# Altium PCB 智能车主板.PcbDoc (part 2 of 2)
Units mm, origin at the board's own origin, x right, y up, seen from the top; angles counter-clockwise.
Board outline 100.45 x 65.28 mm, 4 copper layers (Top, GND02, PWR03, Bottom), stack 0.603 mm thick; 92 components, 74 nets, 364 pads, 217 vias.
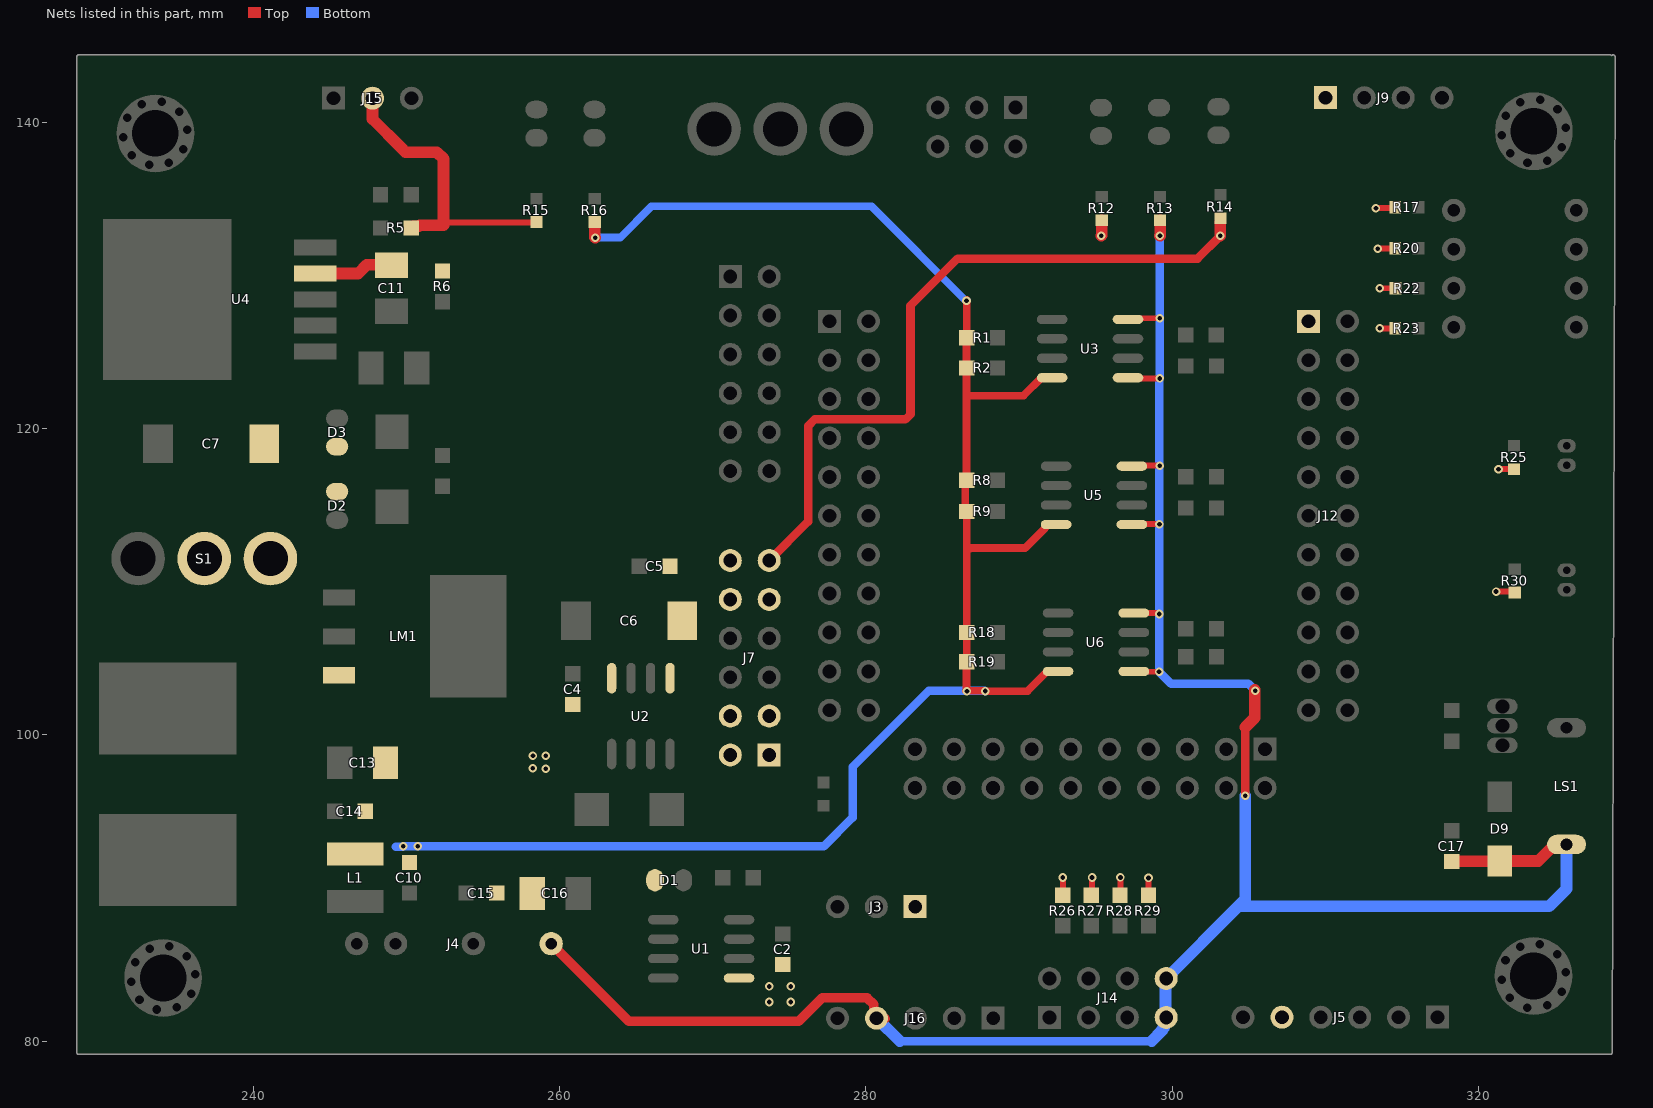
[diagram p4: the nets of this part, all layers, seen from the top]

## Via types
v1: diameter 0.559, hole 0.305, Top to Bottom, tented both sides, 216 vias
v2: diameter 0.559, hole 0.305, Top to Bottom, 1 vias

## Nets (pads, with @x,y where several pads share a name; then routed paths per layer and width w, separated by ;. In a path a pad name is that pad's centre, name@x,y a point inside that pad or via, vN(x,y) a via of type N, cw(c..) or ccw(c..) an arc to the next point about the centre after c; other vN are vias at no path point) (continued)
V5: C10.1 C13.1 C14.1 L1.1 LM1.3 R1.1 R2.1 R8.1 R9.1 R16.1 R18.1 R19.1 U3.8 U5.8 U6.8 | length 118.5
  Top w0.508: R9.1@286.489,114.477 286.489,116.658 286.565,116.734 286.565,122.264 ; v1@286.516,102.868 v1@286.59,102.868 ; R9.1@286.591,114.58 286.591,112.362 ; v1@286.591,128.396 R1.1@286.591,125.935 286.575,125.951 286.574,122.318 286.758,122.134 290.282,122.134 291.465,123.317 U3.8@292.165,123.317 ; v1(286.598,102.847) 286.598,102.861 v1@286.59,102.868 ; 286.792,112.161 286.763,112.19 ; v1(287.797,102.853) 287.806,102.843 287.842,102.843 287.848,102.838 290.544,102.838 291.846,104.14 U6.8@292.546,104.14 ; v1@287.797,102.868 v1@286.59,102.868 ; U5.8@292.419,113.728 291.744,113.728 291.701,113.686 291.701,113.503 290.389,112.19 286.763,112.19 ; v1@286.59,102.868 286.57,102.889 286.57,104.754 R19.1@286.591,104.775 286.589,104.778 286.589,106.677 R18.1@286.591,106.68 286.591,112.362 ; 286.591,112.362 286.763,112.19
  Top w0.762: R16.1@262.294,133.483 262.294,132.495 v1(262.324,132.465)
  Bottom w0.508: v1(262.324,132.465) 263.952,132.465 266,134.513 280.36,134.513 286.522,128.351 286.56,128.351 v1(286.57,128.341)
  Bottom w0.559: 249.306,92.679 249.756,92.679 v1(249.793,92.716) v1(250.728,92.716) 277.254,92.716 279.131,94.592 279.131,97.898 284.113,102.881 287.768,102.881 v1(287.797,102.853)
V6: C11.1 J15.2 R5.1 R6.1 R15.1 U4.4 | length 23.6
  Top w0.381: 252.421,133.45 258.208,133.45 R15.1@258.24,133.482
  Top w0.762: U4.4@244.029,130.124 246.837,130.124 247.396,130.683 C11.1@248.285,130.683 ; J15.2@247.777,141.224 247.777,140.208 249.682,138.303 249.936,138.049 251.975,138.049 252.421,137.603 252.421,133.272 250.866,133.272 250.809,133.215 250.42,133.215 R5.1@250.301,133.096
VBAT: C7.1 D2.1 D3.1 S1.1
VBAT+: S1.2
VCC: J12.1
VCC3.3: C2.1 J3.1 J5.5 J9.1 R12.1 R17.2 R20.2 R22.2 R23.2 R25.1 R26.2 R27.2 R28.2 R29.2 R30.1 U1.5 | length 11.8
  Top w0.381: R26.2@292.862,89.519 v1(292.862,90.678) ; R27.2@294.767,89.519 v1(294.767,90.678) ; R28.2@296.62,89.523 v2(296.62,90.682) ; R29.2@298.452,89.49 v1(298.452,90.649) ; v1(313.426,131.745) R20.2@314.444,131.745 ; v1@313.428,134.392 R17.2@314.446,134.392 ; v1(313.556,126.538) R23.2@314.574,126.538 ; v1(313.563,129.159) R22.2@314.581,129.159 ; v1(321.149,109.351) R30.1@322.165,109.351 ; v1(321.31,117.348) R25.1@322.326,117.348
  Top w0.762: v1(295.377,132.588) 295.402,132.613 R12.1@295.402,133.606
  other v1: 273.685,82.55 275.082,82.55 273.685,83.566 275.082,83.566 313.307,134.372
VCC5: C4.2 C15.1 C16.1 C17.1 D1.1 D9.2 J4.4 J7.1 J7.2 J7.3 J7.4 J14.7 J14.8 J16.4 LS1.1 R13.1 U2.8 U3.1 U3.4 U5.1 U5.4 U6.1 U6.4 | length 148.5
  Top w0.254: U3.1@297.115,123.317 U3.1@297.165,123.267
  Top w0.381: U3.4@297.115,127.127 297.184,127.196 v1(299.182,127.196) ; U3.1@297.165,123.267 v1(299.192,123.267) ; U6.1@297.325,104.102 297.337,104.114 v1(299.144,104.114) ; U6.4@297.496,107.95 297.499,107.947 299.05,107.947 299.112,107.885 v1(299.16,107.885) ; U5.1@297.579,113.754 v1(299.168,113.754) ; U5.4@297.579,117.564 297.589,117.574 v1(299.185,117.574)
  Top w0.559: J16.4@281.206,81.561 J16.4@281.3,81.467 ; v1(304.774,96.023) 304.774,100.491
  Top w0.635: J4.4@259.444,86.244 259.559,86.244 264.52,81.284 275.606,81.284 277.141,82.818 280.08,82.818 280.512,82.385 280.512,81.7 J16.4@280.584,81.628
  Top w0.762: v1(299.202,132.588) 299.212,132.598 R13.1@299.212,133.606 ; 304.774,100.491 305.395,101.112 v1@305.395,102.93 ; C17.1@318.262,91.726 318.276,91.739 321.265,91.739 D9.2@321.31,91.694 ; D9.2@321.391,91.753 323.899,91.753 324.983,92.837 LS1.1@325.628,92.837
  Bottom w0.381: v1(299.182,127.196) v1@299.187,127.191 ; v1@299.187,123.272 v1(299.192,123.267) ; v1@299.195,132.581 v1(299.202,132.588)
  Bottom w0.559: 282.213,79.999 298.663,79.999 ; v1(299.144,104.114) 299.932,103.326 304.979,103.326 v1(305.42,102.884) ; v1@299.168,104.182 v1(299.168,113.754) v1@299.168,117.564 ; v1@299.168,117.739 v1@299.168,123.281 ; v1@299.187,123.272 v1@299.187,127.191 ; v1@299.195,127.372 v1@299.195,132.581
  Bottom w0.762: J16.4@280.645,81.428 280.784,81.428 282.213,79.999 ; 298.663,79.999 299.331,80.666 299.331,80.741 299.467,80.878 299.467,81.408 J14.7@299.593,81.534 ; J14.7@299.559,81.516 J14.8@299.559,84.056 ; J14.8@299.593,84.074 304.321,88.802 ; v1(304.774,96.023) 304.774,89.255 304.321,88.802 ; LS1.1@325.755,92.837 325.755,89.946 324.611,88.802 304.321,88.802
  other v1: 259.097,97.779 258.239,97.808 258.255,98.635 259.096,98.635
VCC-5: C5.1 C6.2 J7.9 J7.10 J7.11 J7.12 R14.1 U2.5 | length 46.9
  Top w0.559: J7.11@273.685,111.379 276.225,113.919 276.225,120.144 ; 276.229,120.168 276.651,120.591 282.583,120.591 282.91,120.918 282.91,128.022 285.987,131.099 301.66,131.099 v1(303.149,132.588)
  Top w0.762: R14.1@303.139,133.471 303.149,133.461 v1(303.149,132.588)
pads on no net: H1.11 H2.11 H3.11 H4.11 J2.VBAT+ J10.7 J10.8 J10.9 J10.10 J11.8 J11.10 J11.13 J11.14 J11.15 J11.17 J11.18 J11.19 J11.20 J12.11 J12.12 J12.13 J12.14 J12.15 J12.16 LM1.4 R24.1 S1.3 S3.3 U1.4 U1.6 U1.7 U1.8 U2.7

## Polygon pours and split planes (outlines as drawn)
GND on Top "GND_L01_P057" (solid, remove dead copper, pour order 57): 228.718,144.741 228.838,144.621 328.812,144.621 328.922,144.511 328.703,144.292 328.703,79.412 252.59,79.412 252.544,79.458 252.544,121.53 252.122,121.952 229.273,121.952 228.583,122.642 228.583,144.646 228.655,144.718
no net on Top "NONET_L01_P092" (solid, pour order 92): 307.811,81.902 307.811,80.564 308.411,79.964 310.713,79.964 310.713,81.489 310.3,81.902
no net on Top "NONET_L01_P091" (solid, pour order 91): 308.158,81.94 307.713,81.495 307.713,80.565 307.839,80.565 308.497,79.906 310.734,79.906 310.734,81.528 310.168,82.095 309.964,81.892 308.095,81.892
no net on Top "NONET_L01_P090" (solid, pour order 90): 308.033,81.916 308.071,81.877 308.071,80.26 310.202,80.26 310.206,80.255 310.206,80.362 310.531,80.037 310.531,81.412 308.396,81.412 307.984,81.824 308.865,81.824 308.865,81.674 309.132,81.407
no net on Top "NONET_L01_P088" (solid, pour order 88): 308.028,82.346 308.108,82.265 308.108,79.874 312.147,79.874 311.935,80.086 311.935,82.411 308.035,82.411 308.02,82.397
no net on Top "NONET_L01_P089" (solid, pour order 89): 307.706,81.574 307.643,81.511 307.643,79.972 311.936,79.972 311.918,79.99 311.918,81.628 307.508,81.628 307.49,81.646
no net on Top "NONET_L01_P086" (solid, pour order 86): 308.971,81.135 309.065,81.042 311.508,81.042 311.508,80.216 311.44,80.148 311.397,80.191 309.499,80.191 309.499,80.489 308.895,81.093
no net on Top "NONET_L01_P085" (solid, pour order 85): 291.351,83.262 292.828,84.74 293.119,84.74 293.119,84.382 294.843,82.658 294.597,82.412 292.268,82.412 291.407,83.273
NetC1_1 on Top "NETC1_1_L01_P055" (solid, pour order 55): 265.708,87.532 267.863,87.532 267.935,87.603 268.763,88.252 268.763,91.4 268.83,91.467 268.718,91.579 267.751,91.579 267.346,91.175 267.346,89.129 267.369,89.106 267.054,88.791 265.637,88.791 265.3,88.454 265.309,87.532
no net on Top "NONET_L01_P087" (solid, pour order 87): 311.749,141.089 311.698,141.037 311.698,140.372 313.547,140.372 314.307,141.132 314.307,141.218 311.896,141.218 311.758,141.08
no net on Top "NONET_L01_P084" (solid, pour order 84): 297.668,88.198 297.813,88.198 297.829,88.214 298.05,87.992 298.05,86.428 297.79,86.428 297.447,86.085 297.218,86.314 296.249,86.314 296.249,86.871 296.203,86.917 296.242,86.955 297.127,86.955 297.127,87.245 297.577,87.695 297.577,88.206 297.775,88.206 297.829,88.26
no net on Top "NONET_L01_P083" (solid, pour order 83): 308.985,103.224 309.11,103.099 309.11,100.077 309.116,100.077 309.166,100.028 310.537,101.398 310.954,101.398 311.989,102.433 311.696,102.726 309.82,102.726 309.228,103.317 309.098,103.187 309.079,103.187
no net on Top "NONET_L01_P082" (solid, pour order 82): 311.129,105.809 311.129,105.051 312.28,103.9 312.28,103.753 312.29,103.753 313.863,102.179 314.021,102.336 314.021,102.425 313.972,102.425 312.801,103.596 312.821,103.615 312.821,105.946 312.417,106.35 312.358,106.291 310.991,106.291 310.991,105.897 311.158,105.73
no net on Top "NONET_L01_P081" (solid, pour order 81): 302.583,106.317 302.571,106.305 302.571,105.704 303.515,105.704 303.574,105.763 303.574,106.034
no net on Top "NONET_L01_P080" (solid, pour order 80): 302.583,106.352 303.173,106.352 303.585,105.939 303.585,106.388 302.701,106.388 302.595,106.282
no net on Top "NONET_L01_P079" (solid, pour order 79): 303.607,115.044 304.371,115.044 304.971,115.643 304.971,115.933
no net on Top "NONET_L01_P078" (solid, pour order 78): 303.5,116.636 303.5,115.065 303.588,114.976 304.487,115.874 308.247,115.874 308.247,116.632 303.627,116.632
no net on Top "NONET_L01_P077" (solid, pour order 77): 309.779,122.411 309.793,122.426 311.606,122.426 312.757,123.577 312.757,123.72 312.541,123.72 312.059,123.238 310.542,123.238 309.772,122.469 310.685,122.469
no net on Top "NONET_L01_P076" (solid, pour order 76): 315.606,134.844 315.614,134.835 315.588,134.809 315.588,133.706 315.166,133.706 315.089,133.784 315.14,133.835 315.14,134.844
no net on Top "NONET_L01_P075" (solid, pour order 75): 313.718,133.146 315.933,133.146 316.019,133.06 315.985,133.025 315.985,131.147 313.83,131.147 313.762,131.216 313.762,133.18
no net on Top "NONET_L01_P074" (solid, pour order 74): 313.756,127.396 313.756,126.007 313.699,125.95 313.746,125.903 316.128,125.903 316.128,126.952 315.816,127.264 315.863,127.311 315.863,127.935 314.379,127.935 313.926,127.481 313.85,127.481
no net on Top "NONET_L01_P073" (solid, pour order 73): 310.694,126.961 310.666,126.933 310.666,125.831 310.735,125.831 311.631,124.935 312.375,124.935 312.375,126.864 312.279,126.961
no net on Top "NONET_L01_P072" (solid, pour order 72): 261.393,140.727 261.405,140.714 261.405,139.119 263.062,139.119 263.112,139.168 263.099,139.181 263.099,140.826 261.405,140.826 261.393,140.813
no net on Top "NONET_L01_P071" (solid, pour order 71): 257.497,140.516 257.645,140.368 257.645,139.292 259.241,139.292 259.29,139.243 259.302,139.255 259.302,140.603 257.658,140.603 257.633,140.578
no net on Top "NONET_L01_P070" (solid, pour order 70): 261.717,134.655 261.731,134.641 261.731,133.588 262.84,133.588 262.819,133.609 262.819,134.648 261.78,134.648 261.766,134.634
no net on Top "NONET_L01_P069" (solid, pour order 69): 257.902,134.548 257.954,134.496 257.954,133.829 258.936,133.829 259.021,133.743 259.045,133.767 259.045,134.643 257.973,134.643 257.954,134.624
no net on Top "NONET_L01_P068" (solid, pour order 68): 302.574,134.849 302.611,134.812 302.611,133.77 303.629,133.77 303.704,133.696 303.704,134.975 302.574,134.975
no net on Top "NONET_L01_P067" (solid, pour order 67): 298.67,135.063 298.7,135.033 299.768,135.033 299.768,133.817 299.773,133.811 299.712,133.75 298.664,133.75 298.664,135.079
no net on Top "NONET_L01_P066" (solid, pour order 66): 294.835,134.926 294.846,134.915 294.846,133.961 295.919,133.961 295.95,133.929 295.953,133.933 295.953,134.985 294.863,134.985 294.832,134.953
GGND on Top "GGND_L01_P058" (solid, remove dead copper, pour order 58): 229.148,121.089 229.215,121.022 251.881,121.022 252.01,120.893 252.01,110.449 251.96,110.399 251.989,110.37 251.989,79.147 228.553,79.147 228.495,79.206 228.495,121.116 229.124,121.116 229.162,121.078
GGND on Top "GGND_L01_P031" (solid, pour order 31): 234.823,120.269 234.823,117.475 234.696,117.348 229.997,117.348 229.743,117.602 229.743,120.015 229.997,120.269
GGND on Top "GGND_L01_P056" (solid, pour order 56): 244.388,95.138 244.708,95.459 244.708,99.343 246.38,99.343 246.4,99.363 246.561,99.203 246.561,96.77 245.94,96.149 245.94,95.579
VCC5 on Top "VCC5_L01_P018" (solid, pour order 18): 262.509,104.648 263.652,104.648 263.652,102.743 263.271,102.362 262.763,102.362 262.763,101.346 259.588,98.171 259.588,88.138 259.461,88.011 260.35,87.122 260.35,85.725 257.048,85.725 256.794,85.471 256.794,88.138 256.413,88.138 255.143,89.408 255.27,89.535 255.27,91.059 256.286,92.075 257.683,92.075 257.683,98.679 257.683,98.933 262.89,104.648 262.89,104.775 263.017,104.775
no net on Top "NONET_L01_P051" (solid, pour order 51): 266.055,92.163
VCC5 on Top "VCC5_L01_P050" (solid, pour order 50): 265.159,91.57 265.108,91.518 265.108,89.27 266.973,89.27 267.101,89.397 267.101,92.106 265.312,92.106 265.274,92.145
VCC-5 on Top "VCC-5_L01_P020" (solid, pour order 20): 266.827,102.743 268.859,102.743 269.24,103.124 269.24,108.331 269.367,108.204 274.701,108.204 274.701,111.76 274.193,112.268 266.827,112.268 266.573,112.014 266.7,111.887 266.7,103.124
V6 on Top "V6_L01_P030" (solid, pour order 30): 248.031,129.794 253.492,129.794 253.492,131.064 253.111,131.445 251.079,131.445 251.079,133.985 249.301,133.985 249.301,131.699 248.031,131.699
GGND on Top "GGND_L01_P045" (solid, pour order 45): 248.49,121.434 247.828,120.772 247.828,118.263 248.461,117.63 254.193,117.63 254.193,120.63 253.411,121.412 248.513,121.412
no net on Top "NONET_L01_P044" (solid, pour order 44): 247.515,121.501
GND on Top "GND_L01_P043" (solid, pour order 43): 278.474,94.156 278.403,94.228 278.403,95.736 278.283,95.856 276.236,95.856 276.194,95.898 276.062,95.766 276.062,93.815 276.122,93.875 278.373,93.875 278.373,94.108 278.474,94.21
no net on Top "NONET_L01_P042" (solid, pour order 42): 266.065,86.614
no net on Top "NONET_L01_P041" (solid, pour order 41): 278.384,86.487
GND on Top "GND_L01_P040" (solid, pour order 40): 273.812,89.027 275.463,89.027 275.717,88.773 275.717,88.138 276.479,88.138 276.479,86.106 276.352,86.233 273.558,86.233 273.558,88.773
no net on Top "NONET_L01_P038" (solid, pour order 38): 273.431,88.265
VCC3.3 on Top "VCC3.3_L01_P037" (solid, pour order 37): 273.812,85.725 275.463,85.725 275.717,85.344 275.717,85.217 275.717,82.169 270.552,82.169 270.51,82.233 270.51,84.582 272.955,84.582
no net on Top "NONET_L01_P034" (solid, pour order 34): 278.13,93.599
VCC5 on Top "VCC5_L01_P033" (solid, pour order 33): 265.087,90.423 266.29,89.22 267.487,92.01 275.247,92.01 275.436,92.2 275.436,102.424 270.294,102.424 269.659,101.789 269.659,96.582 269.786,96.455 274.358,96.455 274.358,92.899 265.087,92.899 265.087,91.756 265.087,89.315
no net on Top "NONET_L01_P032" (solid, pour order 32): 231.648,121.539
no net on Top "NONET_L01_P029" (solid, pour order 29): 252.222,125.984
no net on Top "NONET_L01_P028" (solid, pour order 28): 253.111,125.603
no net on Top "NONET_L01_P027" (solid, pour order 27): 252.984,125.73
no net on Top "NONET_L01_P026" (solid, pour order 26): 251.46,126.111
no net on Top "NONET_L01_P025" (solid, pour order 25): 253.746,125.603
GND on Top "GND_L01_P024" (solid, pour order 24): 242.824,129.032 247.65,129.032 248.031,128.651 254.508,128.651 254.635,128.524 254.635,122.555 249.555,122.555 249.174,122.936 249.174,125.984 248.158,125.984 246.761,127.381 246.761,127.508 243.205,127.508 242.824,127.889
NetC12_1 on Top "NETC12_1_L01_P023" (solid, pour order 23): 246.253,120.015 246.634,120.396 246.634,122.301 248.031,122.301 248.539,122.809 248.539,125.095 245.872,125.095 245.618,125.349 245.618,127.381 242.57,127.381 242.443,127.254 242.443,124.333 243.205,124.333 245.11,122.428 244.856,122.174 244.856,120.015
GND on Top "GND_L01_P022" (solid, pour order 22): 260.35,90.678 264.033,90.678 264.414,90.297 264.414,88.011 264.16,87.757 260.604,87.757 260.35,88.011
GND on Top "GND_L01_P021" (solid, pour order 21): 265.747,109.982 265.748,111.506 265.493,111.76 262.827,111.76 262.572,111.506 262.572,109.982
GND on Top "GND_L01_P019" (solid, pour order 19): 255.397,85.725 255.016,85.344 253.619,85.344 253.238,85.725 253.238,97.917 256.159,100.838 258.699,103.378 258.699,108.331 262.255,108.331 261.747,107.823 261.747,104.013 256.889,99.155 255.016,96.158 255.016,91.313 255.016,87.122 255.397,86.741
NetJ4_1 on Top "NETJ4_1_L01_P017" (solid, pour order 17): 247.904,89.662 247.904,85.852 247.523,85.471 245.745,85.471 245.364,85.852 245.364,89.662
GGND on Top "GGND_L01_P016" (solid, pour order 16): 230.886,94.742 231.14,94.996 243.967,94.996 244.729,95.758 245.999,95.758 245.999,94.488 245.872,94.361 243.586,93.091 243.713,85.852 243.586,85.725 244.348,84.963 248.031,84.963 248.412,85.344 248.412,87.63 249.047,87.63 249.428,88.011 249.428,90.17 251.079,90.17 251.206,90.043 251.206,84.201 250.698,83.693 239.776,83.693 239.776,85.217 237.617,87.376 230.886,87.376 230.886,94.615 230.759,94.742
V5 on Top "V5_L01_P015" (solid, pour order 15): 244.602,104.14 246.888,104.14 247.523,103.505 247.65,103.505 248.221,101.155 248.539,100.838 249.809,99.568 249.809,93.222 251.079,93.222 251.079,90.932 249.555,90.932 248.92,91.567 248.92,92.202 246.888,92.202 246.888,96.52 247.396,97.028 247.523,97.028 247.523,98.933 244.602,101.854
no net on Top "NONET_L01_P014" (solid, pour order 14): 243.967,105.791
GGND on Top "GGND_L01_P013" (solid, pour order 13): 246.76,106.956 242.315,106.956 241.934,106.575 241.934,105.305 242.061,105.178 246.76,105.178
no net on Top "NONET_L01_P011" (solid, pour order 11): 251.714,114.3
no net on Top "NONET_L01_P010" (solid, pour order 10): 254.635,113.538
NetC8_1 on Top "NETC8_1_L01_P009" (solid, pour order 9): 244.602,114.427 244.856,114.681 247.396,114.681 247.396,115.443 247.904,115.951 251.333,115.951 251.714,116.332 251.714,116.713 251.841,116.84 253.111,116.84 253.238,116.713 252.984,116.459 252.984,112.776 252.73,112.522 247.396,112.522 246.888,112.014 246.888,108.331 244.475,108.331 244.348,108.458 244.348,109.601 244.729,109.982 245.872,109.982 245.872,112.268 246.761,113.157 250.317,113.157 250.317,113.538 250.19,113.665 244.729,113.665 244.602,113.792
no net on Top "NONET_L01_P008" (solid, pour order 8): 246.38,117.475
no net on Top "NONET_L01_P007" (solid, pour order 7): 246.761,117.475
VBAT on Top "VBAT_L01_P006" (solid, pour order 6): 240.411,110.998 240.411,119.634 246.253,119.634 247.015,118.872 247.015,115.951 246.253,115.189 242.824,115.189 242.824,110.744 242.443,110.363 240.665,110.363 240.665,110.744
VBAT+ on Top "VBAT+_L01_P005" (solid, pour order 5): 234.696,102.362 234.95,102.616 234.95,112.268 236.093,113.411 237.49,113.411 238.633,112.268 238.633,101.727 238.506,101.727 237.617,100.838 236.22,100.838 234.696,102.362 235.331,102.997 236.982,102.997
GND on Bottom "GND_L04_P059" (solid, remove dead copper, pour order 59): 228.693,144.757 228.814,144.637 328.787,144.637 328.897,144.528 328.678,144.309 328.678,79.429 252.565,79.429 252.519,79.474 252.519,121.546 252.097,121.969 229.248,121.969 228.558,122.658 228.558,144.663 228.63,144.735
GGND on Bottom "GGND_L04_P060" (solid, remove dead copper, pour order 60): 229.085,121.056 229.152,120.989 251.818,120.989 251.948,120.859 251.948,110.416 251.898,110.366 251.926,110.337 251.926,79.114 228.491,79.114 228.432,79.173 228.432,121.083 229.062,121.083 229.1,121.045
VCC5 on Bottom "VCC5_L04_P047" (solid, pour order 47): 257.94,99.064 257.973,99.097 269.409,99.097 270.005,99.692 270.005,101.111 274.326,101.111 274.564,101.349 274.597,101.317 274.597,97.743 269.55,97.743 269.507,97.786 269.171,97.451 257.951,97.451 257.951,99.097 257.94,99.108
GND on GND02 (split plane): 328.218,79.631 254.794,79.631 254.765,79.654 254.703,79.679 254.637,79.688 254.57,79.679 254.509,79.654 254.479,79.631 252.509,79.631 252.509,81.709 252.516,81.763 252.516,120.086 252.507,120.153 252.482,120.214 252.441,120.268 252.269,120.44 252.269,121.419 252.26,121.485 252.235,121.547 252.194,121.6 252.141,121.641 252.079,121.666 252.013,121.675 229.253,121.675 229.153,121.775 229.1,121.816 229.038,121.841 228.983,121.848 228.983,143.889 328.415,143.889
GND on GND02 (split plane): 229.019,121.197 229.063,121.179 229.081,121.171 229.147,121.163 251.757,121.163 251.757,120.334 251.765,120.267 251.791,120.205 251.832,120.152 252.004,119.98 252.004,81.81 251.997,81.756 251.997,79.631 228.983,79.631 228.983,121.224
VCC3.3 on PWR03 (split plane): 328.218,79.631 228.983,79.631 228.983,143.889 328.415,143.889

## Keep-outs
Keep-Out Layer:
  lines w0.254: 228.58,79.295 328.58,79.295 328.779,144.319 ; 228.58,79.319 228.58,144.319 328.58,144.319

## Other copper
Top:
  pour cut-out: 315.075,129.707 315.075,128.709 315.137,128.648 315.584,128.648 315.584,129.722 315.599,129.737 315.594,129.742 315.142,129.742 315.142,129.465 315.224,129.383 315.224,129.758 315.394,129.758 315.414,129.737
  pour cut-out: 315.051,135.011 315.558,135.011 315.568,135.002 315.568,134.761 315.111,134.761 315.103,134.754 315.082,134.776 315.082,135.021
  pour cut-out: 313.886,134.051 313.886,133.99 314.077,133.799 315.058,133.799 314.898,133.959 314.093,133.959 314.1,133.967 314.1,134.15 313.89,134.15 313.822,134.081 313.825,134.077 313.825,133.871
  pour cut-out: 308.081,81.633 307.946,81.499 307.946,81.096 308.789,80.252 308.8,80.263 310.17,80.263 310.17,80.315 308.872,81.613 307.869,81.613
  pour cut-out: 309.064,81.213 311.228,81.213 311.598,80.843 311.551,80.796 311.551,80.151 309.985,80.151 308.97,81.166 308.97,81.197 309.694,81.197 309.843,81.048
  pour cut-out: 275.458,81.784 275.366,81.693 270.343,81.693 270.385,81.734 270.385,81.926
  pour cut-out: 270.409,82.079 270.396,82.067 270.396,81.873 275.403,81.873 275.5,81.776 275.548,81.825 275.548,82.067 270.469,82.067 270.433,82.103 270.433,81.704
  pour cut-out: 293.082,84.739 294.831,82.991 294.831,82.404 292.238,82.404 291.364,83.279 291.473,83.279 292.983,84.789
  pour cut-out: 297.655,88.215 297.655,87.756 296.845,86.945 296.196,86.945 296.259,86.882 296.259,86.27 296.349,86.18 297.43,86.18 298.114,86.864 298.015,86.963 297.853,86.963 297.853,88.035 297.979,88.161 297.871,88.269 297.529,88.269 297.529,87.801 297.601,87.729
  pour cut-out: 309.039,103.23 309.057,103.212 309.057,100.05 309.119,100.05 309.164,100.005 310.566,101.407 310.986,101.407 312.004,102.426 311.799,102.631 311.799,102.747 309.789,102.747 309.244,103.292 309.083,103.292 309.11,103.265 309.11,102.417
  pour cut-out: 310.84,105.987 310.858,105.969 310.858,104.893 311.16,104.893 313.898,102.156 314.049,102.307 314.049,102.414 312.884,103.578 312.884,106.067 312.387,106.564 311.747,105.924 311.747,105.827 311.053,105.827 310.831,106.049
  pour cut-out: 302.69,106.411 303.396,106.411 303.588,106.218 303.588,104.861 302.958,104.861 302.509,105.31 302.509,106.325 303.321,106.325 303.385,106.389
  pour cut-out: 301.215,117.749 301.215,114.284 301.109,114.178 301.215,114.072 303.691,114.072 303.691,115.071 303.68,115.081 304.127,115.081 305.2,116.155 305.338,116.017 308.313,116.017 308.313,116.665 308.25,116.728 303.627,116.728 303.627,117.621 303.5,117.749
  pour cut-out: 309.689,122.368 309.709,122.387 312.082,122.387 312.082,122.829 313.005,123.752 312.932,123.824 312.537,123.824 312.537,123.791 312.049,123.304 310.612,123.304 310.612,123.258 309.709,122.354 310.988,122.354
  pour cut-out: 310.638,126.039 310.638,125.789 311.568,124.859 311.825,124.859 311.231,125.452 311.231,125.729 310.928,125.729 310.592,126.066
  pour cut-out: 310.601,127.071 310.601,126.089 311.794,124.895 312.397,124.895 312.397,126.912 312.439,126.955 312.428,126.965 310.675,126.965
  pour cut-out: 313.819,127.514 313.73,127.425 313.73,125.986 316.144,125.986 315.989,126.141 315.989,127.954 314.348,127.954 313.861,127.467 313.671,127.467
  pour cut-out: 313.818,133.198 313.877,133.139 316.059,133.139 316.059,131.159 316.029,131.13 316.005,131.153 313.8,131.153 313.8,133.097 313.752,133.145
  pour cut-out: 315.096,134.809 315.107,134.797 315.107,133.698 315.779,133.698 315.797,133.715 315.696,133.817 315.696,134.768 315.078,134.768 315.072,134.774
  pour cut-out: 311.873,141.235 311.653,141.015 311.653,140.352 311.697,140.308 311.727,140.337 313.59,140.337 313.59,140.362 314.385,141.157 314.288,141.254 314.288,141.328 312.01,141.328 311.902,141.22
  pour cut-out: 302.489,134.986 302.565,134.91 302.565,133.777 303.604,133.777 303.774,133.608 303.774,134.992 302.577,134.992 302.565,135.003
  pour cut-out: 298.659,135.091 298.6,135.032 298.6,133.725 299.856,133.725 299.897,133.766 299.821,133.841 299.821,135.126 298.711,135.126 298.7,135.114
  pour cut-out: 294.823,134.997 294.835,134.986 294.835,133.946 295.973,133.946 296.002,133.917 296.008,133.923 296.008,135.056 294.858,135.056 294.835,135.032
  pour cut-out: 261.748,134.743 261.748,133.623 262.811,133.623 262.844,133.589 262.878,133.623 262.878,134.719 261.776,134.719 261.724,134.772
  pour cut-out: 261.4,140.855 261.376,140.831 261.376,139.106 263.097,139.106 263.149,139.158 263.149,140.865 261.361,140.865
  pour cut-out: 257.649,139.331 257.649,140.597 257.692,140.64 259.309,140.64 259.309,139.255 259.295,139.241 259.257,139.278 257.663,139.278 257.601,139.34
  pour cut-out: 257.896,134.715 257.924,134.686 257.924,133.847 258.944,133.847 259.025,133.766 259.058,133.799 259.058,134.653 257.99,134.653 257.957,134.62 257.957,134.331
  pour cut-out: 301.66,127.196 301.856,127 304.89,127 304.89,123.871 304.404,123.384 304.362,123.427 301.547,123.427 301.547,127.196
  pour cut-out: 295.989,122.987 295.828,122.827 296.008,122.647 301.547,122.647 301.547,127.453 301.252,127.748 296.089,127.748 296.089,127.404 295.989,127.304
  pour cut-out: 296.415,118.267 301.159,118.267 301.426,118 301.132,117.706 301.132,113.443 296.352,113.443 296.243,113.552 296.415,113.724
  pour cut-out: 297.549,109.015 302.506,109.015 302.525,109.033 302.295,109.033 302.292,109.03 302.604,108.718 302.604,104.453 297.649,104.453 297.549,104.553
  pour cut-out: 299.08,104.718 304.037,104.718 304.056,104.736 303.825,104.736 303.822,104.733 304.135,104.421 304.135,100.156 299.18,100.156 299.08,100.256
  pour cut-out: 294.721,109.465 299.678,109.465 299.696,109.484 299.466,109.484 299.463,109.481 299.776,109.168 299.776,104.903 294.821,104.903 294.721,105.003
  pour cut-out: 296.47,108.276 301.427,108.276 301.445,108.294 301.215,108.294 301.212,108.292 301.525,107.979 301.525,103.714 296.57,103.714 296.47,103.814
  pour cut-out: 296.47,108.276 296.47,103.814 296.57,103.714 301.525,103.714 301.525,108.215 301.445,108.294 301.445,103.632 299.387,103.632 299.313,103.707 299.284,103.679 296.796,103.679
  pour cut-out: 286.591,108.296 286.591,103.4 286.57,103.379 293.485,103.379 293.485,108.189 293.572,108.276 293.564,108.284 286.591,108.284 286.591,103.386 286.694,103.283 286.984,103.283
  pour cut-out: 286.764,117.865 286.792,117.837 286.792,113.582 286.903,113.471 293.464,113.471 293.464,117.846 293.445,117.865
  pour cut-out: 286.489,117.589 286.764,117.865 293.445,117.865 293.445,113.652 293.545,113.552 293.464,113.471 286.591,113.471 286.591,117.655 286.489,117.758
  pour cut-out: 286.565,126.848 286.565,122.758 286.591,122.732 286.75,122.891 293.042,122.891 293.042,127.412 292.865,127.588 292.73,127.453 286.66,127.453 286.66,126.004 286.591,125.935
  pour cut-out: 275.397,117.056 275.426,117.086 275.785,117.086 275.785,120.3 276.516,121.031 277.098,121.031 277.098,121.115 277.141,121.158 276.758,121.541 276.696,121.541 276.696,121.523 275.573,120.399 275.554,120.399 275.554,117.239 275.537,117.221 275.672,117.086 275.785,117.086
  pour cut-out: 275.209,127.487 275.315,127.381 275.911,127.381 275.911,125.334 276.82,124.425 276.82,124.058 276.784,124.058 276.712,123.986 275.696,125.002 275.696,127 275.374,127.322 275.374,127.419 275.873,127.419 275.911,127.381
  pour cut-out: 248.021,90.106
  pour cut-out: 248.662,90.864 249.389,90.864 249.026,91.228
  pour cut-out: 249.555,90.767 249.094,91.228 249.026,91.228 248.662,90.864 248.662,90.668 248.761,90.767
  pour cut-out: 244.657,91.316 244.657,90.02 248.662,90.02 248.662,90.864 249.047,91.249 248.811,91.485 248.687,91.485 248.662,91.46 248.662,91.316
  pour cut-out: 245.755,112.693 245.134,113.315 245.134,113.006 245.755,112.385
  pour cut-out: 245.134,113.315 245.755,112.693 245.755,112.385 246.226,112.855 246.226,113.511 246.03,113.315 245.134,113.315 245.134,113.006 245.755,112.385
  pour cut-out: 240.7,121 241.816,121 239.584,121
  pour cut-out: 239.584,120.401 239.593,120.411 241.838,120.411 241.838,121.022 241.816,121 239.584,121
  pour cut-out: 244.571,121.022 244.615,120.978 244.615,120.37 244.691,120.294 244.691,119.817 244.673,119.799 241.838,119.799 241.838,121.022
  pour cut-out: 261.276,112.902
  pour cut-out: 261.276,112.902
  pour cut-out: 253.355,116.83 253.403,116.782 253.403,116.714 254.192,116.714 253.949,116.957 253.394,116.957 253.355,116.918
  pour cut-out: 246.799,122.136 247.244,121.691 249.047,121.691 249.047,122.301 248.656,122.692 248.148,122.184 246.847,122.184 246.799,122.136 246.799,121.724 247.205,121.724
  pour cut-out: 244.538,115.189 244.538,114.745 244.729,114.554 245.021,114.846 247.231,114.846 247.231,115.511 247.554,115.834 247.063,115.834 246.253,115.024 246.088,115.189 244.538,115.189 244.538,114.998 244.739,114.798
  pour cut-out: 252.489,117.465 254.193,117.465 254.193,116.713 253.949,116.957 252.537,116.957 252.489,117.005 252.489,117.465 254.261,117.465 253.802,117.006 253.802,117.005
  pour cut-out: 246.137,113.5 246.137,112.966 246.406,112.966 246.761,113.322 250.152,113.322 250.152,113.47 250.122,113.5 246.137,113.5 246.137,113.146 246.316,112.966
  pour cut-out: 246.137,113.792 246.126,113.781 246.126,113.411 246.38,113.665
GND02 (plane layer: these items are gaps in the copper):
  lines w0.508: 228.972,121.594 229.147,121.419 252.013,121.419 252.013,120.334 252.26,120.086 252.26,81.763 252.253,81.756 252.253,79.237 252.182,79.167 253.058,79.167 ; 254.372,79.167 254.637,79.432

## Silkscreen, mask and mechanical layers (free items; w line width, h text height)
Top Overlay:
  drawing of 596 lines, arcs and shapes, not listed
Mechanical 1:
  lines w0.254: 228.6,79.248 328.6,79.248 328.799,144.272 314.96,144.272 ; 228.6,79.272 228.6,144.272 328.6,144.272 ; 323.668,139.399 323.668,139.399

## Text inside footprints (layer, text, board x,y; h text height)
J6: Top Overlay "2" at 273.177,132.461 h1.27 r270; Top Overlay "1" at 270.637,132.461 h1.27 r270; Top Overlay "1" at 267.226,117.663 h1.27 r90; Top Overlay "1" at 267.288,116.237 h1.27 r90; Top Overlay "12" at 269.354,116.217 h1.27 r90
J7: Top Overlay "2" at 271.653,96.139 h1.27 r90; Top Overlay "1" at 274.243,96.362 h1.27 r90; Top Overlay "1" at 274.538,113.253 h1.27 r90; Top Overlay "1" at 274.538,114.534 h1.27 r90; Top Overlay "12" at 271.761,113.223 h1.27 r90
J8: Top Overlay "1" at 291.807,141.465 h1.27 r180; Top Overlay "2" at 292.315,138.925 h1.27 r180; Top Overlay "5" at 283.171,141.465 h1.27 r180; Top Overlay "6" at 283.171,138.925 h1.27 r180
J10: Top Overlay "2" at 308.888,96.966 h1.27 r180; Top Overlay "1" at 308.61,99.568 h1.27 r180
J11: Top Overlay "22" at 279.662,100.076 h1.27 r270; Top Overlay "21" at 277.122,100.076 h1.27 r270; Top Overlay "2" at 279.662,129.54 h1.27 r270; Top Overlay "1" at 277.122,129.54 h1.27 r270
J12: Top Overlay "22" at 313.452,102.8 h1.27 r270; Top Overlay "21" at 305.678,102.555 h1.27 r270; Top Overlay "2" at 310.942,129.54 h1.27 r270; Top Overlay "1" at 308.402,129.54 h1.27 r270
J14: Top Overlay "8" at 301.411,83.762 h1.27; Top Overlay "7" at 301.421,81.019 h1.27; Top Overlay "1" at 289.938,80.867 h1.27; Top Overlay "2" at 289.448,83.573 h1.27
LS1: Top Overlay "+" at 326.009,94.107 h0.76 r90